# Altium PCB SW_SWITCHED_LPF_BANK.PcbDoc (part 1 of 2)
Units mm, origin at the board's own origin, x right, y up, seen from the top; angles counter-clockwise.
Board outline 151 x 125 mm, 2 copper layers (Top Layer, Bottom Layer), stack 1.576 mm thick; 115 components, 47 nets, 280 pads, 1853 vias.
Unrouted connection lines stored in the file: 42.
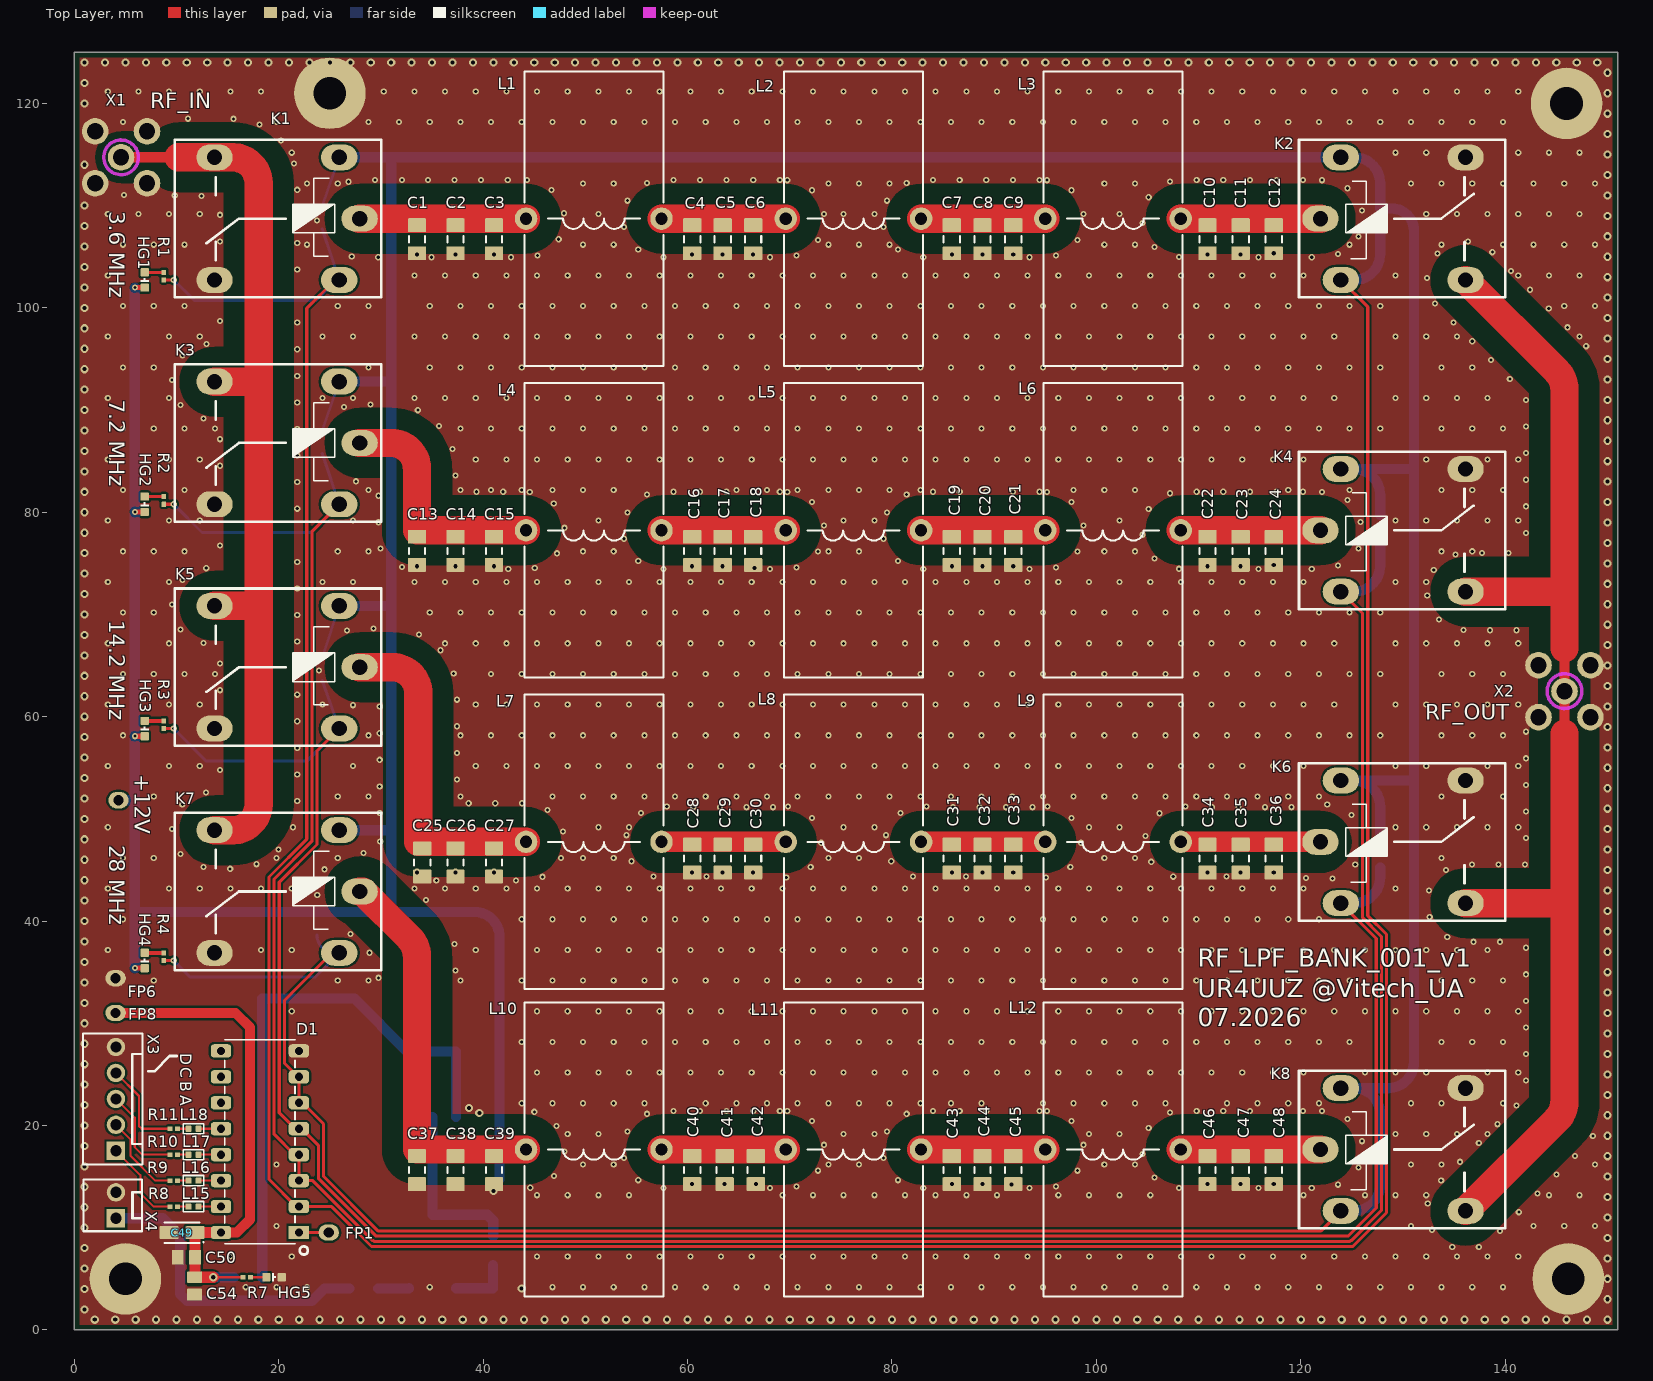
[diagram p0: Top Layer view]
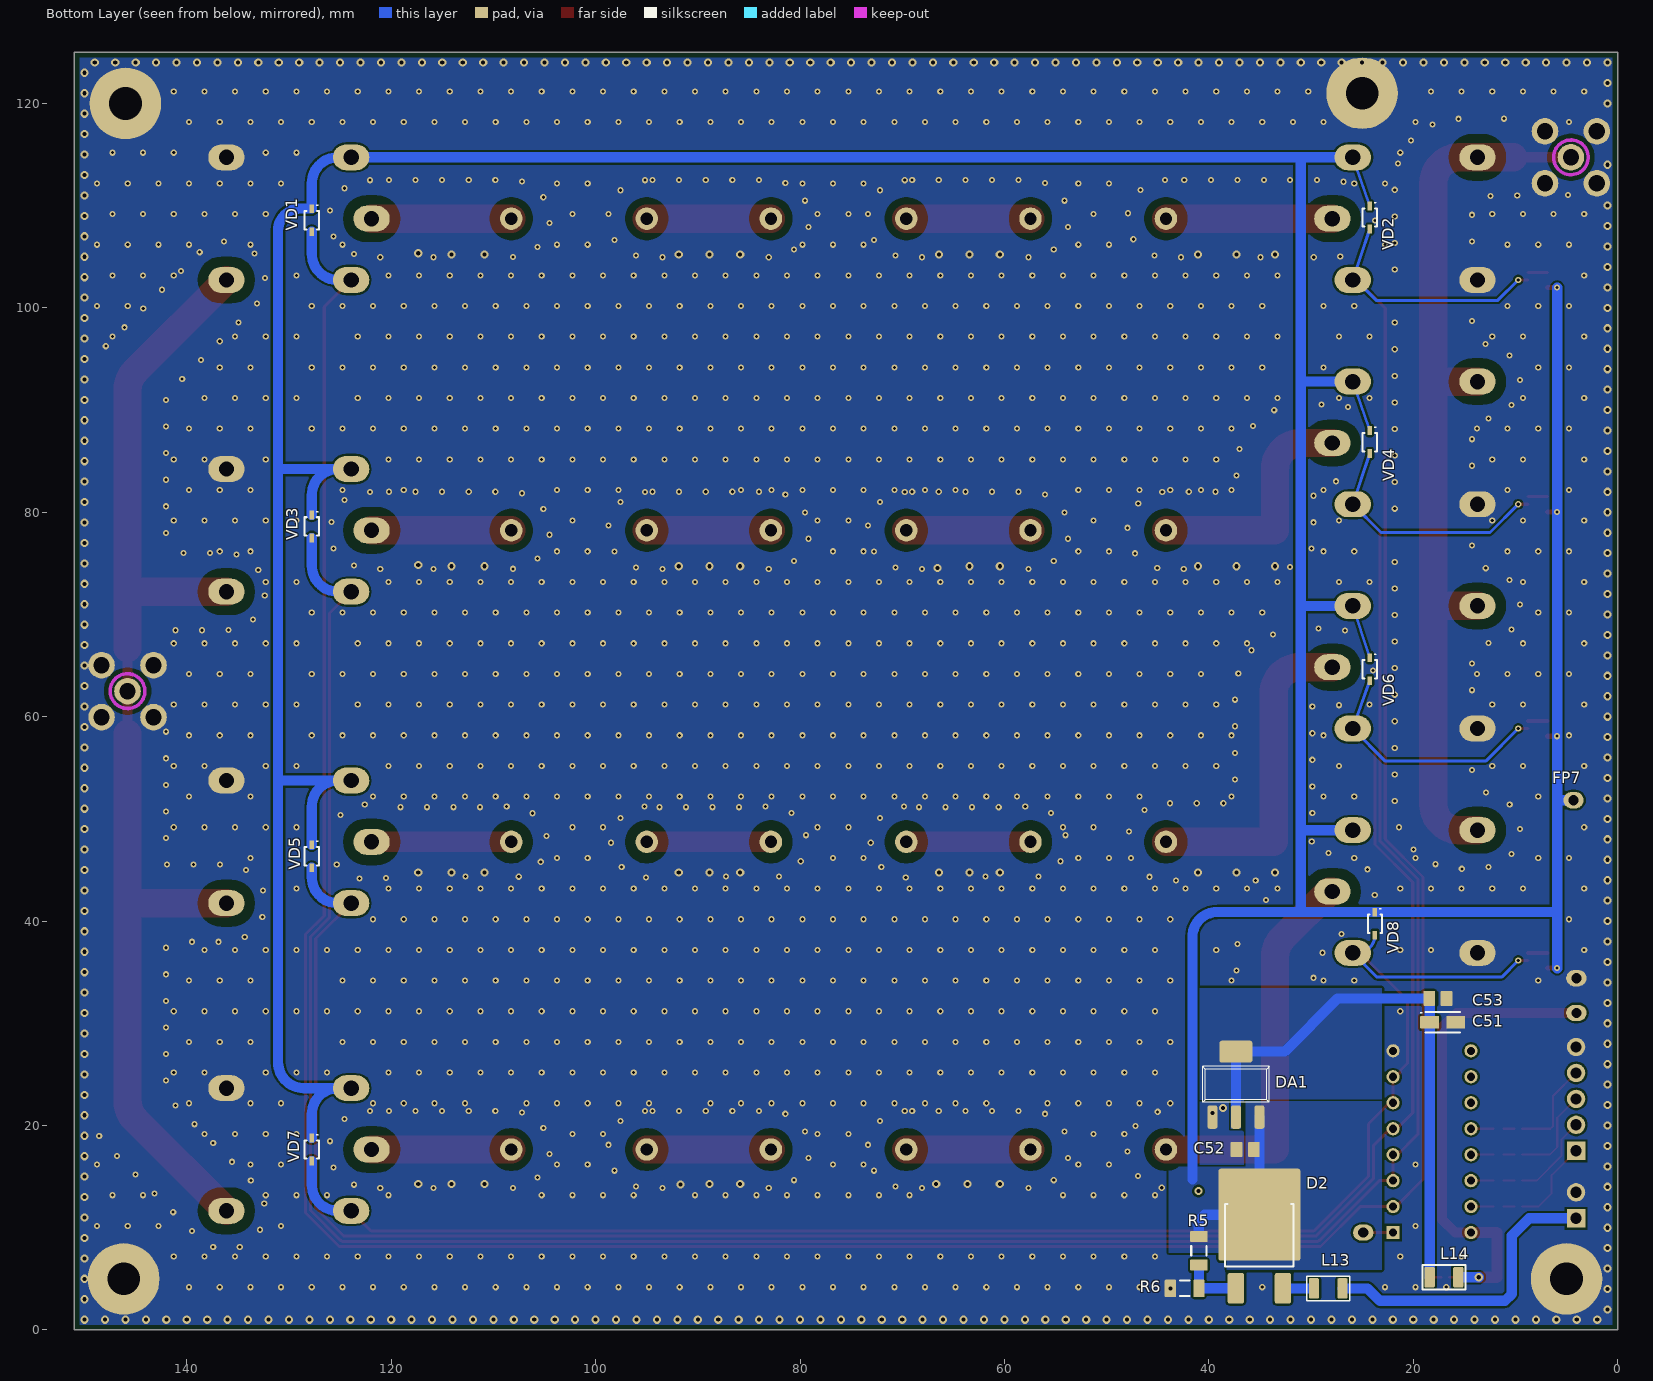
[diagram p1: Bottom Layer view, seen from below]
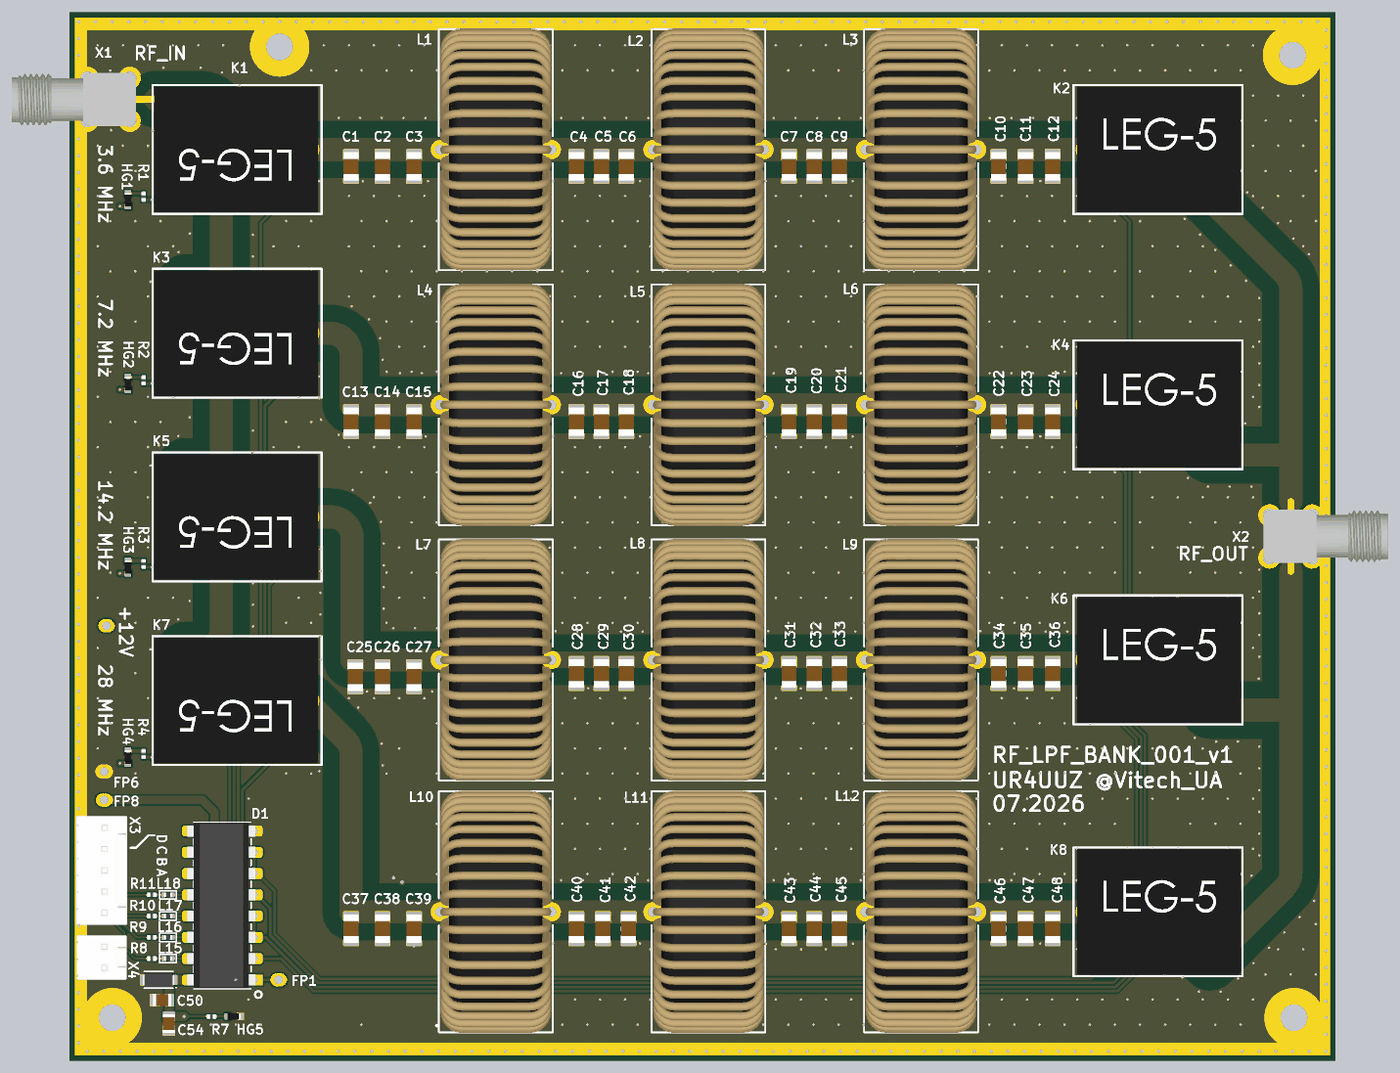
[diagram p3: 3D render of the assembled board from above, using the file's embedded part models]
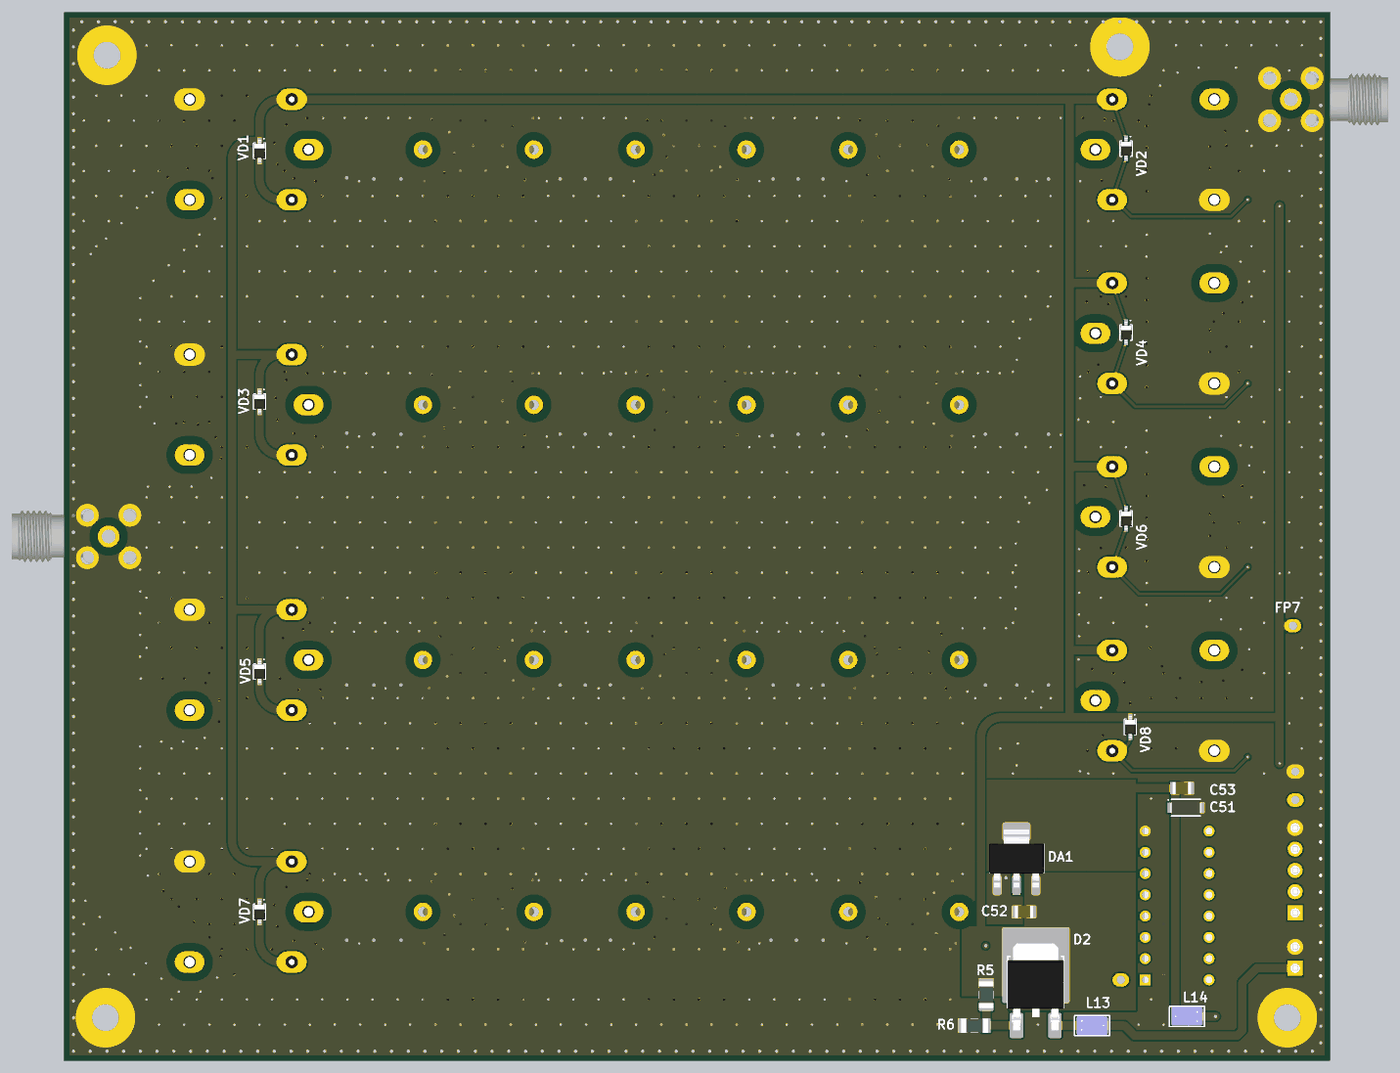
[diagram p4: 3D render of the assembled board from below, using the file's embedded part models]

## Layer stack, top to bottom
Top Solder: solder mask 0.012, Solder Resist, Dk 3.5
Top Layer: signal copper 0.038
Dielectric 1: dielectric 1.5, FR-4, Dk 4.8
Bottom Layer: signal copper 0.038
Bottom Solder: solder mask 0.012, Solder Resist, Dk 3.5

## Board outline
0,0 0,125 151,125 151,0

## Design rules (kind name [scope] priority, off if disabled: settings)
BoardOutlineClearance [All] p1: gap=0.5 ignorepadtopadclearanceinfootprint=FALSE
Clearance MiddleVoltage [InNetClass('MiddleVoltage')] p1: gap=0.5 ignorepadtopadclearanceinfootprint=FALSE except(0: Arc-Hole Track-Hole SMDPad-Hole THPad-Hole Via-Hole Fill-Hole Poly-Hole Region-Hole Text-Hole; 0.2: Arc-Text Track-Text SMDPad-Text THPad-Text Via-Text Fill-Text Poly-Text Region-Text Text-Text)
Clearance CPW [InNetClass('CPW')] p2: gap=1 ignorepadtopadclearanceinfootprint=FALSE except(0: Arc-THPad Arc-Hole Track-THPad Track-Hole SMDPad-Hole THPad-Hole Via-Hole Fill-Hole Poly-Hole Region-Hole Text-Hole; 0.2: Arc-Text Track-Text SMDPad-Text THPad-THPad THPad-Text Via-Text Fill-Text Poly-Text Region-Text Text-Text; 2.03: Arc-Fill Arc-Poly Arc-Region Track-Fill Track-Poly Track-Region)
Clearance Standart [All] p3: gap=0.2 ignorepadtopadclearanceinfootprint=FALSE except(0: Arc-Hole Track-Hole SMDPad-Hole THPad-Hole Via-Hole Fill-Hole Poly-Hole Region-Hole Text-Hole)
ComponentClearance [All] p1: gap=0.1 collisioncheckmode=3 verticalgap=0.1 showdistances=TRUE
Height [All] p1: minheight=0 maxheight=40 prefheight=12.7
HoleSize [All] p1: absolutevalues=TRUE maxlimit=12 minlimit=0.3 maxpercent=80.000 minpercent=20.000
HoleToHoleClearance [All] p1: gap=0.3 allowstackedmicrovias=TRUE
MinimumSolderMaskSliver [All] p1: minsoldermaskwidth=0.1
NetAntennae [All] p1: netantennaetolerance=2
PlaneClearance [All] p1: clearance=0.3
PlaneConnect PlaneConnectMiddleCurrent [InNetClass('MiddleCurrent')] p1: planeconnectstyle=Relief reliefexpansion=0.508 reliefentries=4 reliefconductorwidth=0.5 reliefairgap=0.3
PlaneConnect PlaneHighCurrent [InNetClass('HighCurrent')] p2: planeconnectstyle=Relief reliefexpansion=0.508 reliefentries=4 reliefconductorwidth=0.5 reliefairgap=0.35
PlaneConnect [All] p3: planeconnectstyle=Direct reliefexpansion=0.508 reliefentries=4 reliefconductorwidth=0.3 reliefairgap=0.3
PolygonConnect PolygonConnectMiddleCurrent [All vs InNetClass('MiddleCurrent')] p1: connectstyle=Relief reliefconductorwidth=0.4 reliefentries=4 polygonreliefangle="90 Angle" airgapwidth=0.3
PolygonConnect PolygonHighCurrent [InNetClass('HighCurrent')] p2: connectstyle=Relief reliefconductorwidth=0.5 reliefentries=4 polygonreliefangle="90 Angle" airgapwidth=0.3
PolygonConnect PolygonConnect_Keepout [(ObjectKind = 'Track') And (Layer = 'KeepOutLayer')] p3: connectstyle=Direct reliefconductorwidth=0.254 reliefentries=4 polygonreliefangle="90 Angle" airgapwidth=0.254
PolygonConnect PolygonConnect_Via [IsVia] p4: connectstyle=Direct reliefconductorwidth=0.254 reliefentries=4 polygonreliefangle="90 Angle" airgapwidth=0.254
PolygonConnect [All] p5: connectstyle=Direct reliefconductorwidth=0.3 reliefentries=4 polygonreliefangle="90 Angle" airgapwidth=0.25
RoutingCorners [All] p1: cornerstyle=45-Degree minsetback=1 maxsetback=3
RoutingVias Power [InNetClass('Power')] p1: holewidth=0.8 width=1.5 viastyle="Through Hole" minholewidth=0.5 minwidth=1 maxholewidth=1.2 maxwidth=3
RoutingVias [All] p2: holewidth=0.4 width=0.8 viastyle="Through Hole" minholewidth=0.3 minwidth=0.6 maxholewidth=0.5 maxwidth=1
SilkToSilkClearance [All] p1: silktosilkclearance=0
SilkToSolderMaskClearance [IsPad] p1: minsilkscreentomaskgap=0.05 clearancetoexposedcopper=TRUE
SolderMaskExpansion SolderMaskExpansion_VIA [IsVia] p1: expansion=-3 istentingtop=TRUE useseparateexpansions=TRUE expansionbottom=-3 istentingbottom=TRUE
SolderMaskExpansion [All] p2: expansion=0.05 istentingtop=FALSE
SupplyNets "Schematic Supply Nets_2" [InNet('+5V')] p1: voltage=0.000
SupplyNets "Schematic Supply Nets_1" [InNet('GND')] p2: voltage=0.000
SupplyNets "Schematic Supply Nets" [InNet('+12V')] p3: voltage=0.000
Width Width_ANT [InNetClass('Anthenna')] p1: maxlimit=1.641 minlimit=0.2 preferedwidth=1.641
Width WidthMiddleCurrent [InNetClass('MiddleCurrent')] p2: maxlimit=2 minlimit=0.35 preferedwidth=0.5
Width WidthHighCurrent [InNetClass('HighCurrent')] p3: maxlimit=5 minlimit=0.5 preferedwidth=1
Width [All] p4: maxlimit=2.77 minlimit=0.2 preferedwidth=0.25
19 further rules are at their usual default settings.

## Classes and differential pairs
net class CPW: NetC1_1 NetC4_1 NetC7_1 NetC10_1 NetC13_1 NetC16_1 NetC19_1 NetC22_1 NetC25_1 NetC28_1 NetC31_1 NetC34_1 NetC37_1 NetC40_1 NetC43_1 NetC46_1 NetK1_3 NetK2_3

## Components (designator, comment, footprint, x,y, rotation, side; value= is the part's Value field where it differs from the comment)
C1 "1nF" C_CERAMIC_1206_MED 33.528,106.718 r270 top
C2 "1nF" C_CERAMIC_1206_MED 37.296,106.718 r270 top value=NP
C3 "1nF" C_CERAMIC_1206_MED 41.064,106.718 r270 top value=NP
C4 "1nF" C_CERAMIC_1206_MED 60.452,106.718 r270 top
C5 "1nF" C_CERAMIC_1206_MED 63.43,106.718 r270 top value=NP
C6 "1nF" C_CERAMIC_1206_MED 66.408,106.718 r270 top value=NP
C7 "1nF" C_CERAMIC_1206_MED 85.852,106.718 r270 top
C8 "1nF" C_CERAMIC_1206_MED 88.858,106.718 r270 top value=NP
C9 "1nF" C_CERAMIC_1206_MED 91.864,106.718 r270 top value=NP
C10 "1nF" C_CERAMIC_1206_MED 110.872,106.718 r270 top
C11 "1nF" C_CERAMIC_1206_MED 114.11,106.718 r270 top value=NP
C12 "1nF" C_CERAMIC_1206_MED 117.348,106.718 r270 top value=NP
C13 "1nF" C_CERAMIC_1206_MED 33.528,76.222 r270 top
C14 "1nF" C_CERAMIC_1206_MED 37.296,76.222 r270 top value=NP
C15 "1nF" C_CERAMIC_1206_MED 41.064,76.222 r270 top value=NP
C16 "1nF" C_CERAMIC_1206_MED 60.452,76.222 r270 top
C17 "1nF" C_CERAMIC_1206_MED 63.43,76.222 r270 top value=NP
C18 "1nF" C_CERAMIC_1206_MED 66.408,76.222 r270 top value=NP
C19 "1nF" C_CERAMIC_1206_MED 85.852,76.222 r270 top
C20 "1nF" C_CERAMIC_1206_MED 88.858,76.222 r270 top value=NP
C21 "1nF" C_CERAMIC_1206_MED 91.864,76.222 r270 top value=NP
C22 "1nF" C_CERAMIC_1206_MED 110.872,76.222 r270 top
C23 "1nF" C_CERAMIC_1206_MED 114.11,76.222 r270 top value=NP
C24 "1nF" C_CERAMIC_1206_MED 117.348,76.222 r270 top value=NP
C25 "1nF" C_CERAMIC_1206_MED 34.036,45.742 r270 top
C26 "1nF" C_CERAMIC_1206_MED 37.296,45.742 r270 top value=NP
C27 "1nF" C_CERAMIC_1206_MED 41.064,45.742 r270 top value=NP
C28 "1nF" C_CERAMIC_1206_MED 60.452,46.123 r270 top
C29 "1nF" C_CERAMIC_1206_MED 63.43,46.123 r270 top value=NP
C30 "1nF" C_CERAMIC_1206_MED 66.408,46.123 r270 top value=NP
C31 "1nF" C_CERAMIC_1206_MED 85.852,46.123 r270 top
C32 "1nF" C_CERAMIC_1206_MED 88.858,46.123 r270 top value=NP
C33 "1nF" C_CERAMIC_1206_MED 91.864,46.123 r270 top value=NP
C34 "1nF" C_CERAMIC_1206_MED 110.872,46.123 r270 top
C35 "1nF" C_CERAMIC_1206_MED 114.11,46.123 r270 top value=NP
C36 "1nF" C_CERAMIC_1206_MED 117.348,46.123 r270 top value=NP
C37 "1nF" C_CERAMIC_1206_MED 33.528,15.643 r270 top
C38 "1nF" C_CERAMIC_1206_MED 37.296,15.643 r270 top value=NP
C39 "1nF" C_CERAMIC_1206_MED 41.064,15.643 r270 top value=NP
C40 "1nF" C_CERAMIC_1206_MED 60.452,15.643 r270 top
C41 "1nF" C_CERAMIC_1206_MED 63.627,15.643 r270 top value=NP
C42 "1nF" C_CERAMIC_1206_MED 66.675,15.643 r270 top value=NP
C43 "1nF" C_CERAMIC_1206_MED 85.852,15.643 r270 top
C44 "1nF" C_CERAMIC_1206_MED 88.858,15.643 r270 top value=NP
C45 "1nF" C_CERAMIC_1206_MED 91.864,15.643 r270 top value=NP
C46 "1nF" C_CERAMIC_1206_MED 110.872,15.643 r270 top
C47 "1nF" C_CERAMIC_1206_MED 114.11,15.643 r270 top value=NP
C48 "1nF" C_CERAMIC_1206_MED 117.348,15.643 r270 top value=NP
C49 "2.2uF" C_TANTAL_CASE_A_MED 10.536,9.525 r180 top
C50 "68pF" CAP-0805(2012)X85T10 10.961,7.112 r180 top value=100нФ
C51 "2.2uF" C_TANTAL_CASE_A_MED 17.12,30.099 r180 bottom
C52 "68pF" CAP-0805(2012)X85T10 36.449,17.653 r0 bottom value=100нФ
C53 "68pF" CAP-0805(2012)X85T10 17.59,32.436 r180 bottom value=100нФ
C54 "68pF" CAP-0805(2012)X85T10 11.762,4.312 r270 top value=100нФ
D1 "SN74LS145N" DIP-16 21.971,9.525 r180 top
D2 "LM317MDTG" DPAK 35.052,9.271 r180 bottom
DA1 "LD1117S50TR" SOT-223 37.352,24.028 r180 bottom
FP1 "*" Pad_Disc_1.6x2.0mm_D1.0mm 24.892,9.525 r90 top
FP6 "*" Pad_Disc_1.6x2.0mm_D1.0mm 4.039,34.417 r90 top
FP7 "*" Pad_Disc_1.6x2.0mm_D1.0mm 4.318,51.831 r270 bottom
FP8 "*" Pad_Disc_1.6x2.0mm_D1.0mm 4.039,31.013 r90 top
HG1 "LTST-C193KFKT-5A" LTST-C193KFKT-5A 6.883,102.728 r270 top
HG2 "LTST-C193KFKT-5A" LTST-C193KFKT-5A 6.883,80.784 r270 top
HG3 "LTST-C193KFKT-5A" LTST-C193KFKT-5A 6.883,58.839 r270 top
HG4 "LTST-C193KFKT-5A" LTST-C193KFKT-5A 6.883,36.145 r270 top
HG5 "LTST-C193KFKT-5A" LTST-C193KFKT-5A 19.546,5.156 r180 top
K1 "LEG-12" LEG-xx 19.916,108.728 r0 top
K2 "LEG-12" LEG-xx 129.92,108.728 r180 top
K3 "LEG-12" LEG-xx 19.916,86.784 r0 top
K4 "LEG-12" LEG-xx 129.92,78.232 r180 top
K5 "LEG-12" LEG-xx 19.916,64.839 r0 top
K6 "LEG-12" LEG-xx 129.92,47.752 r180 top
K7 "LEG-12" LEG-xx 19.916,42.895 r0 top
K8 "LEG-12" LEG-xx 129.92,17.653 r180 top
L1 "Fixed inductor, 10мкГн, ±20%, R26.9/14.7/11.2, Kool Mu, µ=125, 157 нГн/витков2" "IND: R26.9/14.7/11.2 (H)" 50.822,108.728 r180 top value=10мкГн
L2 "Fixed inductor, 10мкГн, ±20%, R26.9/14.7/11.2, Kool Mu, µ=125, 157 нГн/витков2" "IND: R26.9/14.7/11.2 (H)" 76.222,108.728 r180 top value=10мкГн
L3 "Fixed inductor, 10мкГн, ±20%, R26.9/14.7/11.2, Kool Mu, µ=125, 157 нГн/витков2" "IND: R26.9/14.7/11.2 (H)" 101.622,108.728 r180 top value=10мкГн
L4 "Fixed inductor, 10мкГн, ±20%, R26.9/14.7/11.2, Kool Mu, µ=125, 157 нГн/витков2" "IND: R26.9/14.7/11.2 (H)" 50.822,78.232 r180 top value=10мкГн
L5 "Fixed inductor, 10мкГн, ±20%, R26.9/14.7/11.2, Kool Mu, µ=125, 157 нГн/витков2" "IND: R26.9/14.7/11.2 (H)" 76.222,78.232 r180 top value=10мкГн
L6 "Fixed inductor, 10мкГн, ±20%, R26.9/14.7/11.2, Kool Mu, µ=125, 157 нГн/витков2" "IND: R26.9/14.7/11.2 (H)" 101.622,78.232 r180 top value=10мкГн
L7 "Fixed inductor, 10мкГн, ±20%, R26.9/14.7/11.2, Kool Mu, µ=125, 157 нГн/витков2" "IND: R26.9/14.7/11.2 (H)" 50.822,47.752 r180 top value=10мкГн
L8 "Fixed inductor, 10мкГн, ±20%, R26.9/14.7/11.2, Kool Mu, µ=125, 157 нГн/витков2" "IND: R26.9/14.7/11.2 (H)" 76.222,47.752 r180 top value=10мкГн
L9 "Fixed inductor, 10мкГн, ±20%, R26.9/14.7/11.2, Kool Mu, µ=125, 157 нГн/витков2" "IND: R26.9/14.7/11.2 (H)" 101.622,47.752 r180 top value=10мкГн
L10 "Fixed inductor, 10мкГн, ±20%, R26.9/14.7/11.2, Kool Mu, µ=125, 157 нГн/витков2" "IND: R26.9/14.7/11.2 (H)" 50.822,17.653 r180 top value=10мкГн
L11 "Fixed inductor, 10мкГн, ±20%, R26.9/14.7/11.2, Kool Mu, µ=125, 157 нГн/витков2" "IND: R26.9/14.7/11.2 (H)" 76.222,17.653 r180 top value=10мкГн
L12 "Fixed inductor, 10мкГн, ±20%, R26.9/14.7/11.2, Kool Mu, µ=125, 157 нГн/витков2" "IND: R26.9/14.7/11.2 (H)" 101.622,17.653 r180 top value=10мкГн
L13 "0,001мкГн" INDWW_1206_3.56x2.16x1.52mm_ATC_WL 28.321,4.064 r0 bottom
L14 "0,001мкГн" INDWW_1206_3.56x2.16x1.52mm_ATC_WL 16.993,5.156 r180 bottom
L15 "1 кОм/100 МГц" FB_0402_1.0x0.5x0.5mm 11.659,12.065 r0 top
L16 "1 кОм/100 МГц" FB_0402_1.0x0.5x0.5mm 11.659,14.605 r0 top
L17 "1 кОм/100 МГц" FB_0402_1.0x0.5x0.5mm 11.659,17.145 r0 top
L18 "1 кОм/100 МГц" FB_0402_1.0x0.5x0.5mm 11.659,19.685 r0 top
R1 "2k" RES0603 8.763,103.103 r90 top value=2кОм
R2 "2k" RES0603 8.763,81.159 r90 top value=2кОм
R3 "2k" RES0603 8.763,59.214 r90 top value=2кОм
R4 "2k" RES0603 8.763,36.52 r90 top value=2кОм
R5 "499k" R_ANY_CHIP_1206_MED 40.97,7.747 r270 bottom value=240
R6 "499k" R_ANY_CHIP_1206_MED 42.367,4.064 r0 bottom value=2.2кОм
R7 "2k" RES0603 16.866,5.156 r0 top value=2кОм
R8 "100" R_ANY_CHIP_0402_HI 9.729,12.062 r0 top
R9 "100" R_ANY_CHIP_0402_HI 9.729,14.605 r0 top
R10 "100" R_ANY_CHIP_0402_HI 9.729,17.145 r0 top
R11 "100" R_ANY_CHIP_0402_HI 9.729,19.685 r0 top
VD1 "1N4148WS" SOD-323_MED 127.762,108.585 r270 bottom
VD2 "1N4148WS" SOD-323_MED 24.257,108.839 r270 bottom
VD3 "1N4148WS" SOD-323_MED 127.762,78.613 r270 bottom
VD4 "1N4148WS" SOD-323_MED 24.257,86.868 r270 bottom
VD5 "1N4148WS" SOD-323_MED 127.762,46.355 r270 bottom
VD6 "1N4148WS" SOD-323_MED 24.257,64.643 r270 bottom
VD7 "1N4148WS" SOD-323_MED 127.762,17.653 r270 bottom
VD8 "1N4148WS" SOD-323_MED 23.749,39.751 r270 bottom
X1 "KLS1-SMA002-B" KLS1-SMA002 4.572,114.728 r0 top
X2 "KLS1-SMA002-B" KLS1-SMA002 145.796,62.5 r180 top
X3 "WH-05S" WF-5S 4.064,22.606 r90 top
X4 "WH-02S" WF-2S 4.064,10.922 r90 top

## Footprints (in the part's own frame and the unit in brackets; to place one, negate y for a bottom-side part, rotate by r counter-clockwise, add the part's x,y. Pads: shape width x height; smd on the part's side, far side on the other; paste and mask are expansions set on the pad)
C_CERAMIC_1206_MED [mm] "Chip Capacitor, 2-Leads, Body 3,20x1,60mm, IPC Medium Density"
  rrect15% 1.35x1.8 smd mask+0.05: 1(-1.375,0) 2(1.375,0)
  silkscreen extent -0.3,-0.8 0.3,0.8, body extent -1.7,-0.9 1.7,0.9, height 1.8
C_TANTAL_CASE_A_MED [mm] "Molded Capacitor, 2-Leads, Body 3,20x1,60mm, IPC Medium Density"
  rrect15% 1.85x1.25 smd: 1(-1.275,0) 2(1.275,0)
  silkscreen extent -2.15,-1 1.7,1, body extent -1.92,-0.9 1.92,0.9, height 1.8
CAP-0805(2012)X85T10 [mm] "Chip Capacitor, 2-Leads, Body 2,00x1,25mm, IPC Medium Density"
  rrect15% 1.15x1.45 smd mask+0.05: 1(-0.85,0) 2(0.85,0)
  Top Layer pour cut-out: -0.05,0.651 0.05,0.651 0.05,-0.649 -0.05,-0.649
  body extent -1.1,-0.72 1.1,0.73, height 0.95
DIP-16 [mm]
  rect 2x1.295 / inner round 1.524 / far side rect 1.295x1.295 hole 0.787 paste-2539.97 mask+0: 1(0,0)
  rrect50% 2x1.295 / inner round 1.524 / far side round 1.295 hole 0.8 paste-2539.97 mask+0: 2(0,-2.54) 3(0,-5.08) 4(0,-7.62) 5(0,-10.16) 6(0,-12.7) 7(0,-15.24) 8(0,-17.78) 9(7.62,-17.78) 10(7.62,-15.24) 11(7.62,-12.7) 12(7.62,-10.16) 13(7.62,-7.62) 14(7.62,-5.08) 15(7.62,-2.54) 16(7.62,0)
  silkscreen extent -0.88,-18.86 7.24,2.15, body extent -0.13,-18.73 8,0.95, height 5.21
DPAK [mm]
  rrect25% 1.6x3 smd mask+0.05: 1(-2.3,-5.2) 3(2.3,-5.2)
  rrect5% 8x9 smd mask+0.05: 2(0,2)
  silkscreen extent -3.35,-3.05 3.35,3.05, body extent -3.36,-5.79 3.36,4.63, height 2.38
FB_0402_1.0x0.5x0.5mm [mm]
  rrect25% 0.6x0.6 smd mask+0.05: 1(-0.5,0) 2(0.5,0)
  silkscreen extent -1,-0.5 1,0.5, body extent -0.5,-0.25 0.5,0.25, height 0.5
"IND: R26.9/14.7/11.2 (H)" [mm]
  round 2.2 hole 1.2: 1(-6.626,0) 2(6.626,0)
  silkscreen extent -6.8,-14.4 6.8,14.4, body extent -6.63,-14.48 6.63,14.48, height 28.98
INDWW_1206_3.56x2.16x1.52mm_ATC_WL [mm] "ATC WL-series"
  rrect25% 1x2 smd mask+0.05: 1(-1.4,0) 2(1.4,0)
  silkscreen extent -2.1,-1.2 2.1,1.2, body extent -1.78,-1.08 1.78,1.08, height 1.51
KLS1-SMA002 [mm] "SMA Connector, Right Angle"
  round 2.6 hole 1.6 mask+0.05: 1(0,0) 2(-2.54,-2.54) 2(-2.54,2.54) 2(2.54,-2.54) 2(2.54,2.54)
  Top Layer pour cut-out: -1.9,0 -1.755,-0.727 -1.344,-1.344 -0.727,-1.755 0,-1.9 0,-1.9 0.727,-1.755 1.344,-1.344 1.755,-0.727 1.9,0 1.9,0 1.755,0.727 1.344,1.344 0.727,1.755 0,1.9 0,1.9 -0.727,1.755 -1.344,1.344 -1.755,0.727 -1.9,0
  Top Layer keep-out circle w0.35: c0,0 r1.7
  Bottom Layer pour cut-out: -1.9,0 -1.755,-0.727 -1.344,-1.344 -0.727,-1.755 0,-1.9 0,-1.9 0.727,-1.755 1.344,-1.344 1.755,-0.727 1.9,0 1.9,0 1.755,0.727 1.344,1.344 0.727,1.755 0,1.9 0,1.9 -0.727,1.755 -1.344,1.344 -1.755,0.727 -1.9,0
  Bottom Layer keep-out circle w0.35: c0,0 r1.7
  body extent -11.58,-3.2 3.28,3.15, height 9.57
LEG-xx [mm] "LEG Series 1PDT Relay"
  oval 3.556x2.54 hole 1.5: 1(6,-6) 2(6,6) 3(-6.2,6) 4(8,0) 5(-6.2,-6)
  silkscreen extent -10.1,-7.7 10.1,7.7, body extent -9.85,-7.5 9.65,7.5, height 3.5
LTST-C193KFKT-5A [mm] "SMD 0603 Indication LED, Orange, Lens Clear"
  rrect15% 0.8x0.8 smd: AN(0.75,0) CA(-0.75,0)
  silkscreen extent -0.18,-0.4 0.18,0.4, body extent -0.79,-0.4 0.8,0.4, height 0.35
Pad_Disc_1.6x2.0mm_D1.0mm [mm]
  oval 1.6x2 hole 1 paste-2539.97 mask+0.05: 1(0,0)
R_ANY_CHIP_0402_HI [mm] "Chip Resistor, 2-Leads, Body 1,00x0,50mm, IPC High Density"
  rrect15% 0.5x0.45 smd mask+0.05: 1(-0.375,0) 2(0.375,0)
  body extent -0.52,-0.27 0.53,0.28, height 0.4
R_ANY_CHIP_1206_MED [mm] "Chip Resistor, 2-Leads, Body 3,10x1,60mm, IPC Medium Density"
  rrect15% 1.1x1.7 smd: 1(-1.4,0) 2(1.4,0)
  silkscreen extent -0.45,-0.75 0.45,0.75, body extent -1.6,-0.85 1.6,0.85, height 0.65
RES0603 [mm]
  rrect15% 0.5x0.45 smd mask+0.05: 1(-0.375,0) 2(0.375,0)
  body extent -0.52,-0.27 0.53,0.28, height 0.4
SOD-323_MED [mm] "SOD-323, 2-Leads, Body 1,25x2,50mm, IPC Medium Density"
  rrect15% 0.85x0.45 smd paste+0 mask+0.05: AN(1.125,0) CA(-1.125,0)
  silkscreen extent -1.5,-0.7 0.9,0.7, body extent -1.3,-0.67 1.3,0.68, height 1.1
SOT-223 [mm]
  rrect50% 1x2.3 smd mask+0.05: 1(-2.3,-3.2) 2(0,-3.2) 3(2.3,-3.2)
  rrect25% 3.25x2.15 smd mask+0.05: 4(0,3.2)
  silkscreen extent -3.22,-1.75 3.28,1.75, body extent -3.25,-3.48 3.25,3.48, height 1.68
WF-2S [mm] "Connector; Header; 2 Position"
  rect 1.8x1.8 hole 1.1: 1(0,0)
  round 1.8 hole 1.1: 2(2.54,0)
  silkscreen extent -1.27,-2.54 3.81,3.18, body extent -1.2,-2.6 3.8,3.2, height 11.62
WF-5S [mm] "2.54mm 5-pin connector"
  rect 1.8x1.8 hole 1.1: 1(-5.08,0)
  round 1.8 hole 1.1: 2(-2.54,0) 3(0,0) 4(2.54,0) 5(5.08,0)
  silkscreen extent -6.4,-2.63 6.38,3.22, body extent -6.35,-2.6 6.35,3.2, height 12.24

## Part data
C1 C2 C3 C4 C5 C6 C7 C8 C9 C10 C11 C12 C13 C14 C15 C16 C17 C18 C19 C20 C21 C22 C23 C24 C25 C26 C27 C28 C29 C30 C31 C32 C33 C34 C35 C36 C37 C38 C39 C40 C41 C42 C43 C44 C45 C46 C47 C48: library part 1206B102K102CG, "1nF 1000V X7R ±10% 1206 Ceramic Capacitor RoHS", Dielectric Type=X7R, Manufacturer=Walsin, Package=1206, Supplier Part Number 1=791-1206B102K102CT, Temperature Range="-55°C ~ 125°C", Tolerance=±10%, Voltage=1000V, Component Status=Released, Component Type=SMD, ComponentLink1Description=Datasheet, ComponentLink1URL=https://eu.mouser.com/datasheet/2/210/Middle_and_High_Voltage_DS-1535659.pdf, Part Number=1206B102K102CG, Part Type="Ceramic / X7R / 1206", Price=0, Replacement=NONE, Standard Lead Time="31 Weeks", Supplier 1=Mouser
C49 C51: library part TAJA225K010SNJ, "2.2uF 10V ±10% Case A Tantalum Capacitors, ESR 7Ohm", Dielectric Type=NONE, Manufacturer=AVX, Package="Case A", Supplier Part Number 1=581-TAJA225K010SNJ, Temperature Range="-55°C ~ 125°C", Tolerance=±10%, Voltage=10V, Component Status=Released, Component Type=SMD, ComponentLink1Description=Datasheet, ComponentLink1URL=https://eu.mouser.com/datasheet/2/40/TAJ-3165264.pdf, Part Number=TAJA225K010SNJ, Part Type=Tantalum, Price=0.118, Replacement=NONE, Standard Lead Time="11 Weeks", Supplier 1=Mouser
C50 C52 C53 C54: library part 08055A680JAT2A, "68pF 50V C0G, NP0 ±5% 0805 Ceramic Capacitor RoHS", Dielectric Type=C0G/NP0, Manufacturer=AVX, Package=0805, Supplier Part Number 1=478-1314-2-ND, Temperature Range="-55°C ~ 125°C", Tolerance=±5%, Voltage=50V, Component Status=Released, Component Type=SMD, ComponentLink1Description=Datasheet, ComponentLink1URL=http://catalogs.avx.com/SurfaceMount.pdf, Part Number=08055A680JAT2A, Part Type="Ceramic / C0G(NP0) / 0805", Price=NONE, Replacement=NONE, Standard Lead Time="12 Weeks", Supplier 1=Digi-Key
D1: "IC DECODER 1 X 4:10 16-PDIP", Manufacturer="Texas Instruments", Max Operating Temperature=+125°C, Min Operating Temperature=-40°C, Package=16-DIP, Component Function="Decoder 1 x 4:10 16-PDIP", ComponentLink1Description="Datasheet Link", ComponentLink1URL=https://www.ti.com/lit/ds/symlink/sn74145.pdf?HQS=dis-dk-null-digikeymode-dsf-pf-null-wwe&ts=1783117745260&ref_url=https%253A%252F%252Fr150.goodao.net%252Fproduct%252Fproduct%252Fdownload%253Furl%253DUGNIczE4OHMvT1JqdlZxajlkZVNNOWFaeXhtd3pUcE5LdENtL2VVTzFqR0lQaThUMmRtclkvUzh0cEVMcDNKUnlTUkZVNzdyTFpOTjZMY3ZmR0k5aFpWODJjczRNQStKWnYzVjZmYk5SbUpWK2RhZ3VjVWF5MHNNRnFsOFRFbS9PT043ZUJURVZDRE1ocGJwc1ZMUTUyelh4SXY2Z1RkR0NFamlLWkhrbThvPQ%253D%253D, Mount=SMT, Name="SN74LS145N [Texas Instruments]", Number of Pins=16, Part Number=SN74LS145N, Type=Мікросхема
D2: "4.25V to 40V Input Linear Voltage Regulator, 1 Output 500mA, Adjustable, TO-252-3 (DPAK)", Manufacturer=Onsemi, Package=DPAK, Supplier Part Number 1=863-LM317MDTG, Temperature Range="0°C ~ 125°C", Component Status=Released, Component Type=SMD, ComponentLink1Description=Datasheet, ComponentLink1URL=https://eu.mouser.com/datasheet/2/308/LM317M_D-1810713.pdf, Lifecycle="Packaging Not for Production", Part Number=LM317MDTG, Part Type="Power / Linear Regulator", Price=0.352, Replacement=NONE, Standard Lead Time="61 Weeks", Supplier 1=Mouser
DA1: "Adjustable and fixed low drop positive voltage regulator, 5V 800mA, 1.25V to 15V Vin", Manufacturer=STMicroelectronics, Package=SOT-223, Supplier Part Number 1=497-6447-2-ND, Temperature Range="0°C ~ 125°C", Component Status=Released, Component Type=SMD, ComponentLink1Description=Datasheet, ComponentLink1URL=https://www.st.com/content/ccc/resource/technical/document/datasheet/99/3b/7d/91/91/51/4b/be/CD00000544.pdf/files/CD00000544.pdf/jcr:content/translations/en.CD00000544.pdf, Part Number=LD1117S50TR, Part Type="Power / Linear Regulator", Price=0.66, Replacement=NONE, Standard Lead Time="14 Weeks", Supplier 1=Digi-Key
FP1 FP6 FP7 FP8: library part "IN-OUT DIP_1.6x2_d1.0", "In-Out Pad 2x1 mm"
HG1 HG2 HG3 HG4 HG5: "Indication LED, Orange 605nm, Clear, SMD 0603, Vf 1.7V - 2.3V, 11.2 ~ 45mcd @ 5 mA, 130°", Color=Orange, Manufacturer="Lite-On Optoelectronics", Package=0603, Supplier Part Number 1=160-1829-2-ND, Temperature Range="-30°C ~ 85°C", Component Status=Released, Component Type=SMD, ComponentLink1Description=Datasheet, GUID_1C=f1c02737-053e-11ea-ab58-0050569f2651, Part Number=LTST-C193KFKT-5A, Part Type="LED / 0603", Price=0.02, Replacement=NONE, Supplier 1=Digi-Key, Wavelength=605nm
K1 K2 K3 K4 K5 K6 K7 K8: "General Purpose Relay, 1 Form C (1PDT), 12VDC 400Ohm Coil, 120VAC/24VDC @ 10A, 240VAC Max", Manufacturer="Recoy/Rayex Electronics", Temperature Range="-25°C ~ 80°C", Component Status=Released, Component Type=PTH, ComponentLink1Description=Datasheet, Part Type=Relay, Price=0.54089086, Replacement=NONE
L1 L2 L3 L4 L5 L6 L7 L8 L9 L10 L11 L12: library part Inductor_R26.9/14.7/11.2, Manufacturer=Magnetics, Package=R26.9/14.7/11.2, PartNumber=0077930A7, Tolerance=±20%, TypeInductor="Fixed inductor", ValueManufacturerPartNumber="Fixed inductor, 10мкГн, ±20%, R26.9/14.7/11.2, Kool Mu, µ=125, 157 нГн/витков2", AL="157 нГн/витков2", HelpURL=http://ferrite.ru/warehouse/r-26-914-711-2-77930-a7.html, MaterialPermeability=µ=125, TypeMatiriel="Kool Mu"
L13 L14: library part INDWW_SMD_1206, "nH Unshielded Wirewound Inductor  A mOhm 1206", Current Rating (Max)="4 A", DC Resistance (DCR) (Max)="8 мОм", Manufacturer=Murata, Max Operating Temperature=+125°C, Min Operating Temperature=-55°C, Package=1206, Q @ Frequency="30 @ 100 МГц", Tolerance=±*%, ComponentLink1Description="Datasheet Link", Mount=SMT, Name="0,001мкГн ±*% 4 A 1206 * [Murata]", Number of Pins=2, SRF="100 МГц", Type="Котушка індуктивності"
L15 L16 L17 L18: library part FERRITE_BEAD_SMD_0402, "Ferrite Bead SMD 0402", Current Rating (Max)="4 A", DC Resistance (DCR) (Max)="8 мОм", Impedance / Frequency="33 Ом/100 МГц", Manufacturer=Murata, Max Operating Temperature=+125°C, Min Operating Temperature=-55°C, Package=0402, Part Number=BLM15AX102SN1D, ComponentLink1Description="Datasheet Link", Mount=SMT, Name="Impedance / Frequency Current Rating (Max) 0402 BLM15AX102SN1D [Murata]", Number of Pins=2, Type="Фільтр феритовий"
R1 R2 R3 R4 R7: library part ERJ-3RQFR47V, "RES 2K OHM 1% 1/10W 0603", Manufacturer="Panasonic Electronic Components", Package=0603, Tolerance=1%, Voltage=50V, Component Type=SMD, Part Number=ERJ-3RQFR47V
R5 R6: library part CHV1206-FX-4993ELF, "499 kOhms ±1%, 1/4W 1206 Thick Film Resistor", Manufacturer=Bourns, Package=1206, Power Rating=0.25W, Supplier Part Number 1=652-CHV1206FX4993ELF, Temperature Range="-55°C ~ 155°C", Temperature Stability=±100ppm/°C, Tolerance=±1%, Voltage=800V, Ajax_1C_PN=NONE, Ajax_1С_Status="RND Only", Component Status=Released, Component Type=SMD, ComponentLink1Description=Datasheet, ComponentLink1URL=https://eu.mouser.com/datasheet/2/54/CHV-777595.pdf, Part Number=CHV1206-FX-4993ELF, Part Type="Thick Film", Price=NONE, Replacement=NONE, Supplier 1=Mouser
R8 R9 R10 R11: library part RES_0402, "RES 0.47 OHM 1% 1/16W 0402", Manufacturer="Panasonic Electronic Components", Package=0402, Part Number=ERJ-3RQFR47V, Tolerance=1%, Voltage=50V, Component Type=SMD
VD1 VD2 VD3 VD4 VD5 VD6 VD7 VD8: library part 1N4148WS-E3-08, "Diode Standard 75V 150mA, SOD-323", Current=150mA, Manufacturer="Vishay Semiconductor", Package=SOD-323, Supplier Part Number 1=1N4148WS-E3-08TR-ND, Temperature Range="-55°C ~ 150°C", Voltage=75V, Component Status=Released, Component Type=SMD, ComponentLink1Description=Datasheet, Marking=A2, Part Number=1N4148WS, Part Type="Fast Switching", Price=0.03132463, Replacement=1N4148WS, Standard Lead Time="12 Weeks", Supplier 1=Digi-Key, Vf="1.2V @ 100mA"
X1 X2: library part L-KLS1-SMA002-B, "50Ohm SMA Connector, Right Angle, Female, 5.08mm", Manufacturer="KLS Electronic", Temperature Range="-55°C ~ 155°C", Component Type=PTH, ComponentLink1Description=Datasheet, Part Number=L-KLS1-SMA002-B, Part Type="RF Connector", Price=0.56474318, Replacement=NONE
X3: library part CI3105P1V00, "WH Series 2.54mm Wire to Board Straight DIP Type Headers, 5 Pin", Manufacturer=CviLux, Temperature Range="-25℃ ~ 85℃", Component Type=PTH, ComponentLink1Description=Datasheet, Part Type="Wire-to-Board / Header", Price=0.04446498, Replacement=NONE
X4: library part CI3102P1V00, "WH Series 2.54mm Wire to Board Straight DIP Type Headers, 2 Pin", Manufacturer=CviLux, Temperature Range="-25℃ ~ 85℃", Component Type=PTH, ComponentLink1Description=Datasheet, Part Type="Wire-to-Board / Header", Price=0.02434867, Replacement=NONE

## Free pads (board coordinates)
  round 7 hole 3.2: 8(5,5) 8(25,121) 8(146,120) 8(146.171,5)

## Via types
v1: diameter 0.6, hole 0.3, Top Layer to Bottom Layer, tented both sides, 1534 vias
v2: diameter 0.8, hole 0.4, Top Layer to Bottom Layer, tented both sides, 319 vias

## Nets (pads, with @x,y where several pads share a name; then routed paths per layer and width w, separated by ;. In a path a pad name is that pad's centre, name@x,y a point inside that pad or via, vN(x,y) a via of type N, cw(c..) or ccw(c..) an arc to the next point about the centre after c; other vN are vias at no path point)
15M_EN: D1.6 D1.7 K7.1 K8.2 R4.1 VD7.AN VD8.AN | length 158.6
  Top Layer w0.3: R4.1@8.763,36.145 v1(9.727,36.145) ; K7.1@25.916,36.895 25.211,36.895 20.55,32.234 20.55,26.11 21.228,25.431 21.228,25.249 21.713,24.765 D1.7@21.971,24.765 D1.6@21.971,22.225 22.327,22.225 24.384,20.168 24.384,15.029 29.743,9.669 121.936,9.669 K8.2@123.92,11.653
  Bottom Layer w0.3: v1(9.727,36.145) 11.354,34.519 23.54,34.519 K7.1@25.916,36.895 25.48,36.895 cw(c25.48,38.626) VD8.AN@23.749,38.626
  Bottom Layer w1: K8.2@123.92,11.653 125.222,11.653 ccw(c125.222,14.193) 127.762,14.193 VD7.AN@127.762,16.528
20M_EN: D1.5 K5.1 K6.2 R3.1 VD5.AN VD6.AN | length 217.3
  Top Layer w0.3: R3.1@8.763,58.839 v1(9.727,58.839) ; D1.5@21.615,19.685 20.05,21.25 20.05,43.799 23.749,47.498 23.749,56.672 K5.1@25.916,58.839 ; D1.5@21.971,19.685 22.25,19.685 23.876,18.059 23.876,14.83 29.536,9.169 124.612,9.169 127.381,11.938 127.381,38.291 K6.2@123.92,41.752
  Bottom Layer w0.3: v1(9.727,58.839) 12.915,55.651 22.728,55.651 K5.1@25.916,58.839 24.332,63.306 VD6.AN@24.257,63.518
  Bottom Layer w1: K6.2@123.92,41.752 125.222,41.752 ccw(c125.222,44.292) 127.762,44.292 VD5.AN@127.762,45.23
40M_EN: D1.3 D1.4 K3.1 K4.2 R2.1 VD3.AN VD4.AN | length 274.6
  Top Layer w0.3: R2.1@8.763,80.784 v1(9.727,80.784) ; K3.1@25.916,80.784 23.241,78.109 23.241,47.807 19.55,44.116 19.55,19.134 21.539,17.145 D1.4@21.971,17.145 D1.3@21.971,14.605 23.339,14.605 29.206,8.738 29.261,8.738 29.329,8.669 124.82,8.669 124.888,8.738 124.943,8.738 127.881,11.676 127.881,38.498 126.048,40.331 126.048,70.104 K4.2@123.92,72.232
  Bottom Layer w0.3: v1(9.727,80.784) 12.482,78.029 23.161,78.029 K3.1@25.916,80.784 24.332,85.519 VD4.AN@24.257,85.743
  Bottom Layer w1: K4.2@123.92,72.232 125.222,72.232 ccw(c125.222,74.772) 127.762,74.772 VD3.AN@127.762,77.488
80M_EN: D1.2 K1.1 K2.2 R1.1 VD1.AN VD2.AN | length 328.8
  Top Layer w0.3: R1.1@8.763,102.728 v1(9.727,102.728) ; K1.1@25.916,102.728 25.512,102.728 22.741,99.957 22.741,48.014 19.05,44.323 19.05,14.728 21.713,12.065 D1.2@21.971,12.065 25.171,12.065 29.067,8.169 125.082,8.169 128.381,11.469 128.381,38.705 126.548,40.538 126.548,100.1 K2.2@123.92,102.728
  Bottom Layer w0.3: v1(9.727,102.728) 11.719,100.736 23.622,100.736 K1.1@25.614,102.728 ; VD2.AN@24.257,107.714 24.332,107.489 K1.1@25.916,102.728
  Bottom Layer w1: K2.2@123.92,102.728 125.222,102.728 ccw(c125.222,105.268) 127.762,105.268 VD1.AN@127.762,107.46
+5V: C49.1 C50.1 C54.1 D1.16 FP8.1 L14.2 R7.1 | length 49.5
  Top Layer w0.25: v2(13.589,5.156) R7.1@16.491,5.156
  Top Layer w1: FP8.1@4.039,31.013 15.773,31.013 17.196,29.591 17.196,10.82 15.915,9.54 14.366,9.54 D1.16@14.351,9.525
  Top Layer w1.1: v2(13.589,5.156) 11.811,5.156 C50.1@11.811,7.112 C49.1@11.811,9.525 D1.16@14.351,9.525
  Bottom Layer w1: v2(13.589,5.156) L14.2@15.593,5.156
+12V: C52.1 D2.2 DA1.3 FP7.1 HG1.AN HG2.AN HG3.AN HG4.AN K1.2 K2.1 K3.2 K4.1 K5.2 K6.1 K7.2 K8.1 R5.1 VD1.CA VD2.CA VD3.CA VD4.CA VD5.CA VD6.CA VD7.CA VD8.CA | length 489.5
  Top Layer w0.5: v1(5.919,35.395) HG4.AN@6.883,35.395 ; v1(5.919,58.089) HG3.AN@6.883,58.089 ; v1(5.919,80.034) HG2.AN@6.883,80.034 ; v1(5.919,101.978) HG1.AN@6.883,101.978
  Bottom Layer w0.25: VD6.CA@24.257,65.768 24.355,66.068 K5.2@25.916,70.839 ; VD4.CA@24.257,87.993 24.357,88.282 K3.2@25.916,92.784 ; VD2.CA@24.257,109.964 24.357,110.251 K1.2@25.916,114.728
  Bottom Layer w1: FP7.1@4.318,51.831 4.356,51.831 5.919,51.831 ; v1(5.919,35.395) 5.919,40.894 ; v1(5.919,101.978) v1(5.919,80.034) v1(5.919,58.089) 5.919,51.831 ; K7.2@25.916,48.895 30.912,48.895 31.013,48.997 ; K5.2@25.916,70.839 30.811,70.839 31.013,70.637 ; K3.2@25.916,92.784 30.985,92.784 31.013,92.812 ; K1.2@25.916,114.728 31.013,114.728 ; DA1.3@35.052,20.828 D2.2@35.052,11.271 40.41,11.271 40.996,10.685 R5.1@40.996,9.197 ; 41.605,14.709 41.605,38.456 ccw(c39.167,38.456) 39.167,40.894 30.962,40.894 ; K8.1@123.92,23.653 K8.1@125.222,23.653 ; K6.1@123.92,53.752 K6.1@125.222,53.752 ; K4.1@123.92,84.232 K4.1@125.222,84.232 ; VD7.CA@127.762,18.778 127.762,21.113 ccw(c125.222,21.113) K8.1@125.222,23.653 ; VD5.CA@127.762,47.48 127.762,51.212 ccw(c125.222,51.212) K6.1@125.222,53.752 ; VD3.CA@127.762,79.738 127.762,81.692 ccw(c125.222,81.692) K4.1@125.222,84.232 ; 5.919,40.894 30.962,40.894 ; 5.919,40.894 5.919,51.831 ; 30.962,40.894 31.013,40.945 31.013,48.997 ; 31.013,48.997 31.013,70.637 ; 31.013,70.637 31.013,92.812 ; 31.013,92.812 31.013,114.728 ; 31.013,114.728 K2.1@123.92,114.728 125.222,114.728 cw(c125.222,112.188) 127.762,112.188 VD1.CA@127.762,109.71 128.923,109.71 cw(c128.923,107.569) 131.064,107.569 131.064,84.074 ; K8.1@125.222,23.653 128.524,23.653 ccw(c128.524,26.193) 131.064,26.193 131.064,53.721 ; K6.1@125.222,53.752 131.033,53.752 cw(c131.033,53.721) 131.064,53.721 ; K4.1@125.222,84.232 130.906,84.232 cw(c130.906,84.074) 131.064,84.074 ; 131.064,53.721 131.064,84.074